# Altium PCB SAT_GPS_CLOCK_1.PcbDoc
Units mm, origin at the board's own origin, x right, y up, seen from the top; angles counter-clockwise.
Board outline 108 x 92 mm, 2 copper layers (Top Layer, Bottom Layer); 26 components, 30 nets, 113 pads, 38 vias.
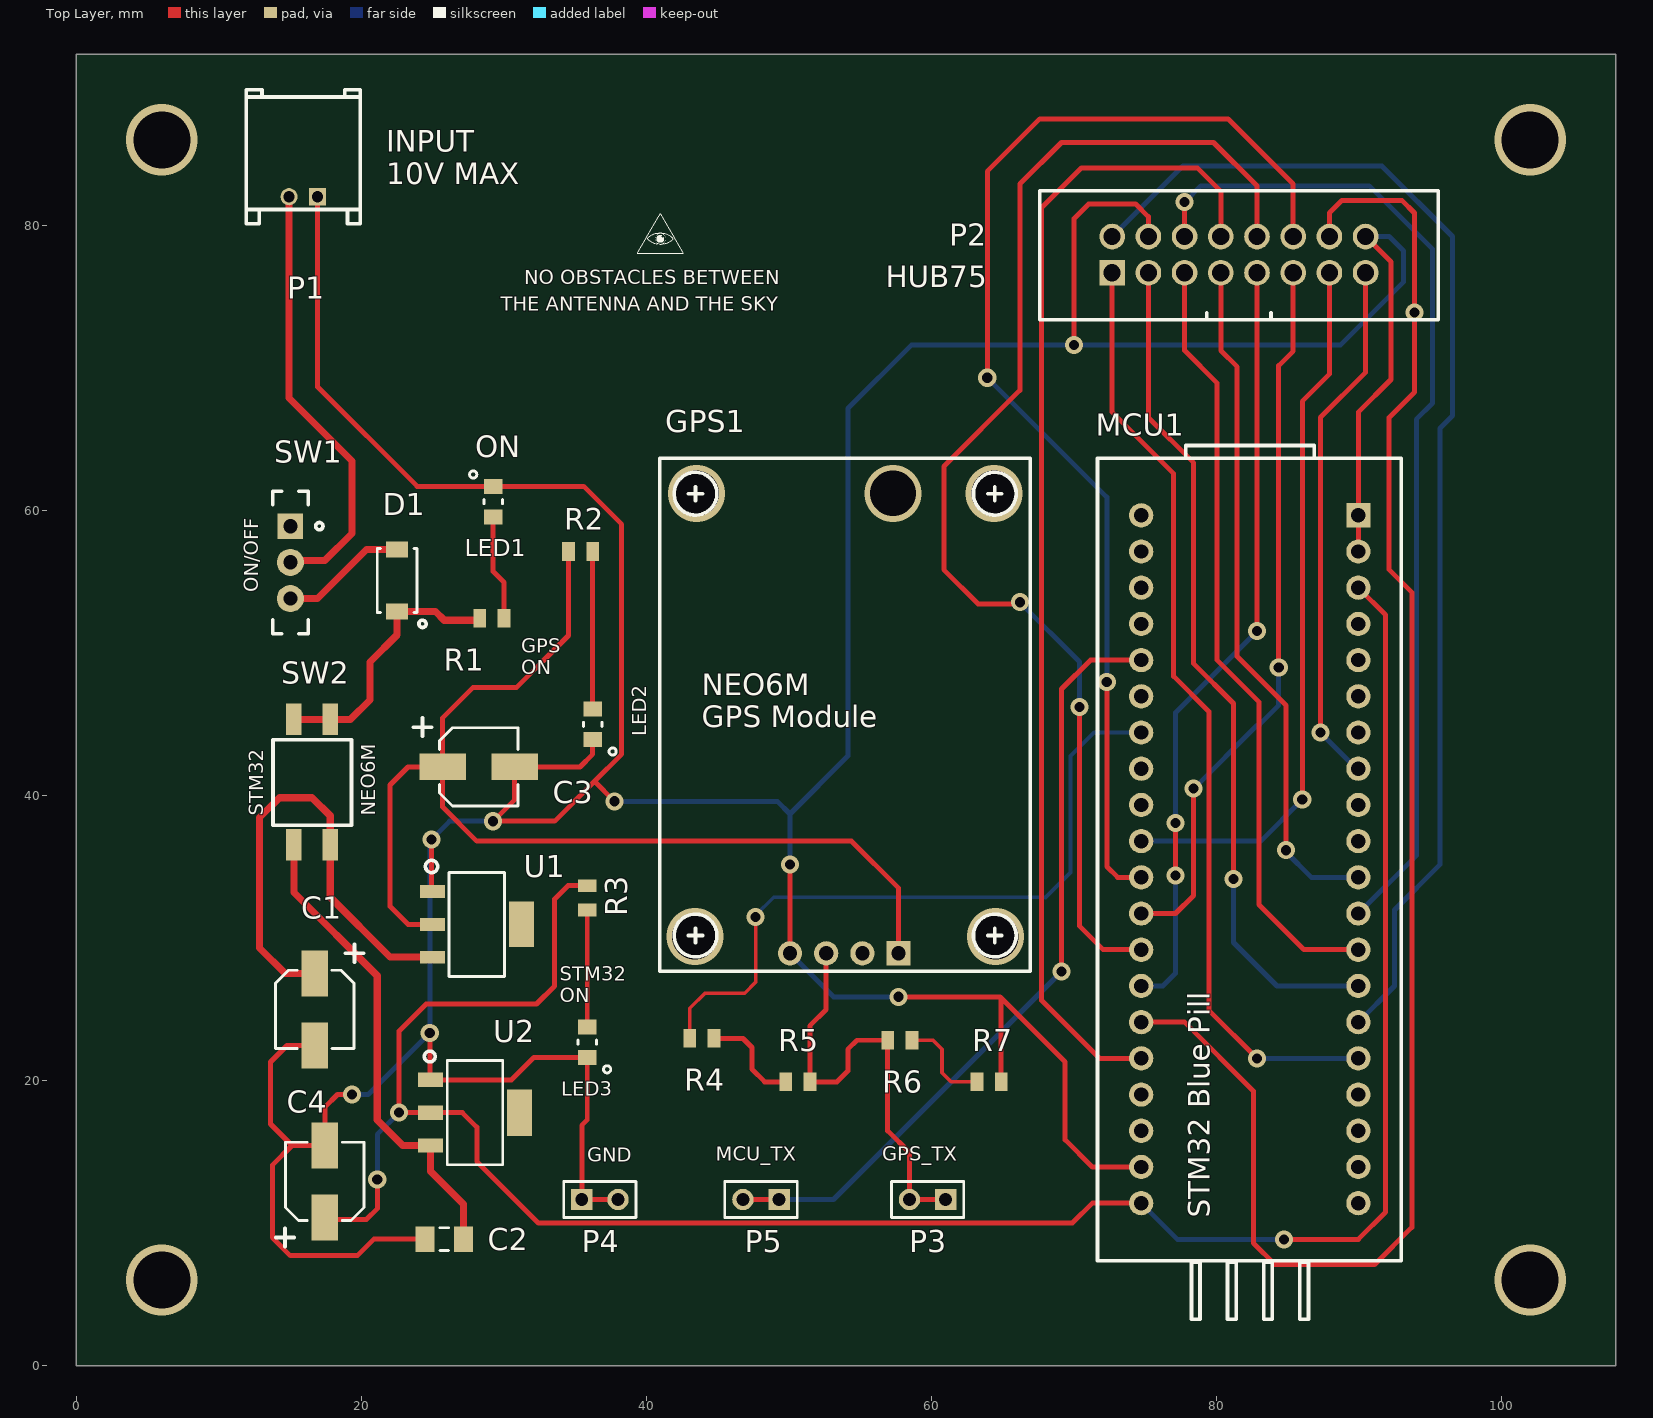
[diagram p0: Top Layer view]
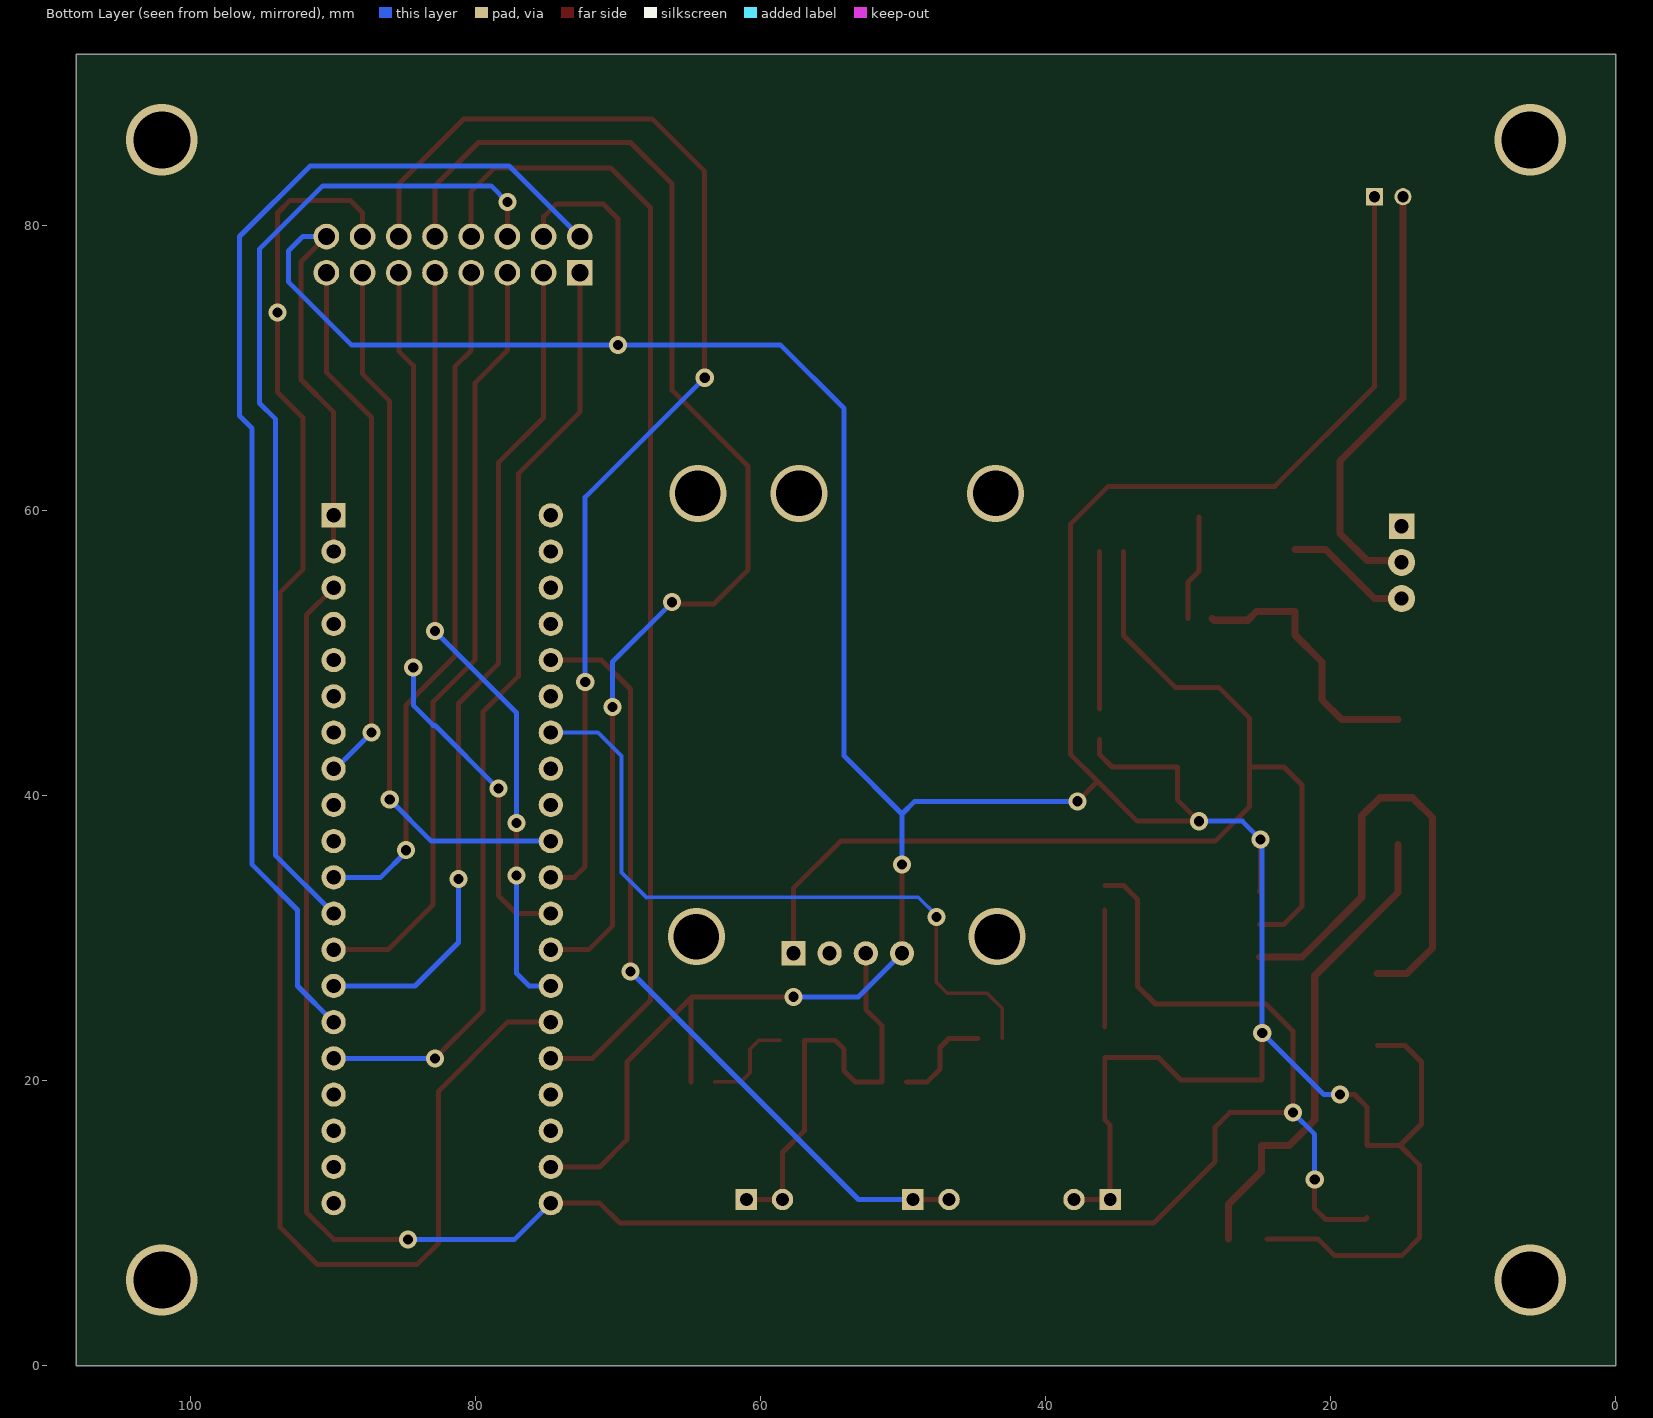
[diagram p1: Bottom Layer view, seen from below]

## Layer stack, top to bottom
Top Solder: solder mask 0.0102, Solder Resist, Dk 3.5
Top Layer: signal copper 0.0356
Dielectric 1: dielectric 0.32, FR-4, Dk 4.8
Bottom Layer: signal copper 0.0356
Bottom Solder: solder mask 0.0102, Solder Resist, Dk 3.5

## Board outline
0,0 108,0 108,92 0,92

## Design rules (kind name [scope] priority, off if disabled: settings)
Clearance [All] p1: gap=0.254 ignorepadtopadclearanceinfootprint=FALSE except(0: Arc-Hole Track-Hole SMDPad-Hole THPad-Hole Via-Hole Fill-Hole Poly-Hole Region-Hole Text-Hole)
PolygonConnect [All] p1: connectstyle=Relief reliefconductorwidth=0.254 reliefentries=4 polygonreliefangle="90 Angle" airgapwidth=0.254
RoutingVias [All] p1: holewidth=0.711 width=1.27 viastyle="Through Hole" minholewidth=0.711 minwidth=1.27 maxholewidth=0.711 maxwidth=1.27
SolderMaskExpansion [All] p1: expansion=0.102 istentingtop=FALSE
Width [All] p1: maxlimit=0.5 minlimit=0.254 preferedwidth=0.35 minimp=50.000000 maximp=50.000000 favimp=50.000000
30 further rules are at their usual default settings.

## Classes and differential pairs
component class SATHORN_GPS_CLOCK_Input: C1 C2 C3 C4 D1 LED1 LED2 LED3 P1 P4 R1 R2 R3 SW1 SW2 U1 U2
component class SATHORN_GPS_CLOCK_IC: GPS1 MCU1 P2 P3 P5 R4 R5 R6 R7

## Components (designator, comment, footprint, x,y, rotation, side; value= is the part's Value field where it differs from the comment)
C1 "10uF" SMT_CAP_EL_CHANG_VT1E100MC054000CE0 16.725,24.987 r270 top
C2 "100nF" SMT_CAP_1206(3216)_SAMSUNG 25.813,8.871 r0 top
C3 "10uF" SMT_CAP_EL_CHANG_VT1E100MC054000CE0 28.226,42.005 r0 top
C4 "10uF" SMT_CAP_EL_CHANG_VT1E100MC054000CE0 17.431,12.922 r90 top
D1 "S1B" DIOM4227X23N 22.511,55.086 r270 top
GPS1 "NEO6M" THT_NEO6M_FINAL 57.69,28.924 r90 top
LED1 "RED" DIOM2012X18N 29.242,60.615 r90 top
LED2 "RED" DIOM2012X18N 36.227,44.994 r270 top
LED3 "RED" DIOM2012X18N 35.846,22.694 r270 top
MCU1 "STM32" STM32F103C6T6_THT 89.948,59.658 r270 top
P1 "5.6-10VDC" THT_CON_WAFER_2P_RIGHT-ANGLE_A2010WR0-2P-SW-5E 14.923,82.01 r0 top
P2 "HUB75" THT_CON_2316S-16G 81.571,77.926 r90 top
P3 "GPS_TX" HDR1X2 60.992,11.652 r180 top
P4 "GND" HDR1X2 35.465,11.652 r0 top
P5 "MCU_TX" HDR1X2 49.308,11.652 r180 top
R1 "1K" SMT_RES_0805(2012) 29.154,52.419 r180 top
R2 "1K" SMT_RES_0805(2012) 35.377,57.118 r180 top
R3 "1K" SMT_RES_0805(2012) 35.846,32.822 r90 top
R4 "50" SMT_RES_0805(2012) 43.886,22.955 r180 top
R5 "100" SMT_RES_0805(2012) 50.617,19.907 r180 top
R6 "500" SMT_RES_0805(2012) 57.778,22.828 r180 top
R7 "300" SMT_RES_0805(2012) 64.04,19.907 r180 top
SW1 "ON/OFF" THT_SSW_ESP1010 15.018,58.896 r270 top
SW2 "DIS02G01-R" SMT_SWITCH_DIP_DIS02G01-R 17.812,45.344 r180 top
U1 "LM1117" SOT230P700X180-4N 28.099,30.956 r0 top
U2 "LD1117AS3" SMT_VR_LD1117AS3 27.972,17.748 r0 top

## Footprints (in the part's own frame and the unit in brackets; to place one, negate y for a bottom-side part, rotate by r counter-clockwise, add the part's x,y. Pads: shape width x height; smd on the part's side, far side on the other; paste and mask are expansions set on the pad)
DIOM2012X18N [mm] "Molded Diode, 2-Leads, Body 2,00x1,25mm, IPC Medium Density"
  rect 1.05x1.3 smd: 1(-1.075,0) 2(1.075,0)
  silkscreen extent -0.15,-0.65 2.16,1.65, body extent -1.1,-0.63 1.1,0.63, height 0.8
DIOM4227X23N [mm] "Molded Diode, 2-Leads, Body 4,25x2,67mm, IPC Medium Density"
  rect 1.1x1.55 smd: 1(-2.175,0) 2(2.175,0)
  silkscreen extent -2.25,-1.4 3.3,2.03, body extent -2.25,-1.4 2.25,1.39, height 2.29
HDR1X2 [mm] "Connector; Header; 2 Position"
  rect 1.5x1.5 hole 0.9: 1(0,0)
  round 1.5 hole 0.9: 2(2.54,0)
  silkscreen extent -1.27,-1.27 3.81,1.27
SMT_CAP_1206(3216)_SAMSUNG [mm] "Ceramic Capacitor 1206(3216) Samsung CL31B104KBCNNNC 50VDC"
  rect 1.3x1.8 smd: 1(-1.35,0) 2(1.35,0)
  silkscreen extent -0.3,-0.8 0.3,0.8, body extent -1.6,-0.9 1.6,0.9, height 1.8
SMT_CAP_EL_CHANG_VT1E100MC054000CE0 [mm] "SMT Capacitor Electrolytic 35V 10uF Pitch 1.3mm VT1E100MC054000CE0"
  rect 3.25x1.85 smd: 1(-2.525,0) 2(2.525,0)
  silkscreen extent -4.57,-2.75 2.75,3.43, body extent -2.75,-2.75 2.75,2.75, height 5.7
SMT_RES_0805(2012) [mm] "0805(2012) Resistor 1/4-1/8W 150V 2A"
  rect 0.9x1.3 smd: 1(-0.85,0) 2(0.85,0)
  body extent -1.1,-0.65 1.1,0.65, height 0.55
SMT_SWITCH_DIP_DIS02G01-R [mm] "DIP SMD Switch 2-Line 4-Pole 2.54Pitch Rating 25mA/24Vdc Height 0.70mm"
  rect 1.1x2.2 smd: 1(0,0) 2(2.55,0) 3(2.55,8.8) 4(0,8.8)
  silkscreen extent -1.49,1.42 4.01,7.42, body extent -1.5,1.4 4,7.4, height 4
SMT_VR_LD1117AS3 [mm] "Voltage Regulator ST LD1117AS33TR 1A 3.3V 10Vmax"
  rect 1.75x1 smd: 1(-3.125,2.3) 2(-3.125,0) 3(-3.125,-2.3)
  rect 1.75x3.25 smd: 4(3.125,0)
  silkscreen extent -3.55,-3.65 1.95,4.32, body extent -1.85,-3.65 1.85,3.65, height 1.8
SOT230P700X180-4N [mm] "SOT223, 4-Leads, Body 7,00x7,00mm (avg), Pitch 2,30mm, IPC Medium Density"
  rect 1.75x0.9 smd: 1(-3.125,2.3) 2(-3.125,0) 3(-3.125,-2.3)
  rect 1.75x3.2 smd: 4(3.125,0)
  silkscreen extent -3.6,-3.65 1.95,4.49, body extent -1.85,-3.65 1.85,3.65, height 1.8
STM32F103C6T6_THT [mm] "STM32F103C8T6 Blue Pill"
  rect 1.7x1.7 hole 1: 1(0,0)
  round 1.7 hole 1: 2(2.54,0) 3(5.08,0) 4(7.62,0) 5(10.16,0) 6(12.7,0) 7(15.24,0) 8(17.78,0) 9(20.32,0) 10(22.86,0) 11(25.4,0) 12(27.94,0) 13(30.48,0) 14(33.02,0) 15(35.56,0) 16(38.1,0) 17(40.64,0) 18(43.18,0) 19(45.72,0) 20(48.26,0) 21(0,-15.24) 22(2.54,-15.24) 23(5.08,-15.24) 24(7.62,-15.24) 25(10.16,-15.24) 26(12.7,-15.24) 27(15.24,-15.24) 28(17.78,-15.24) 29(20.32,-15.24) 30(22.86,-15.24) 31(25.4,-15.24) 32(27.94,-15.24) 33(30.48,-15.24) 34(33.02,-15.24) 35(35.56,-15.24) 36(38.1,-15.24) 37(40.64,-15.24) 38(43.18,-15.24) 39(45.72,-15.24) 40(48.26,-15.24)
  silkscreen extent -4.9,-18.3 56.4,3
THT_CON_2316S-16G [mm] "Connector 2316S-16G 16 Pin 2.54 Pitch"
  rect 1.8x1.8 hole 1.2: 1(-1.25,8.895)
  round 1.8 hole 1.2: 2(1.29,8.895) 3(-1.25,6.355) 4(1.29,6.355) 5(-1.25,3.815) 6(1.29,3.815) 7(-1.25,1.275) 8(1.29,1.275) 9(-1.25,-1.265) 10(1.29,-1.265) 11(-1.25,-3.805) 12(1.29,-3.805) 13(-1.25,-6.345) 14(1.29,-6.345) 15(-1.25,-8.885) 16(1.29,-8.885)
  silkscreen extent -4.55,-13.99 4.5,13.99, body extent -4.59,-14.03 4.55,14, height 8.85
THT_CON_WAFER_2P_RIGHT-ANGLE_A2010WR0-2P-SW-5E [mm] "Connector Wafer 2-Pins Pitch-2.0mm Right Angle A2010WR0-2P-SW-5E"
  rect 1.2x1.2 hole 0.8: 1(2,0)
  round 1.2 hole 0.8: 2(0,0)
  silkscreen extent -3,-1.9 5,7.5, body extent -3,-1.9 5,7.5, height 5.6
THT_NEO6M_FINAL [mm] "GPS Module NEO6M Breakout Board"
  rect 1.7x1.7 hole 1: 1(0,0)
  round 1.7 hole 1: 2(0,2.54) 3(0,5.08) 4(0,7.62)
  silkscreen extent -1.25,-9.25 34.75,16.75
THT_SSW_ESP1010 [mm] "Slide Switch ESP1010 12V 0.5A"
  rect 1.8x1.8 hole 1: 1(0,0)
  round 1.9 hole 1: 2(5.08,0) 3(2.54,0)
  silkscreen extent -2.46,-1.25 7.54,2.29, body extent -2.44,-1.25 7.56,1.25, height 9.5

## Part data
C1 C3 C4: library part SMT_CAP_EL_CHANG_VT1E100MC054000CE0, "SMT Capacitor Electrolytic 35V 10uF Pitch 1.3mm VT1E100MC054000CE0"
C2: library part SMT_CAP_1206(3216)_SAMSUNG, "Ceramic Capacitor 1206(3216) Samsung CL31B104KBCNNNC 50VDC"
D1: library part SMT_DIODE_DO-214AC, "Standart Diode DO-214AC 1A"
GPS1: library part THT_NEO6M_FINAL, "GPS Module NEO6M Breakout Board"
LED1 LED2 LED3: library part SMT_LED_0805(2012), "Led Diode 0805(2012) Cathode Mark, 20mA"
MCU1: library part STM32F103C6T6_THT, "STM32F103C8T6 Blue Pill"
P1: library part THT_CON_WAFER_2P_RIGHT-ANGLE_A2010WR0-2P-SW-5E, "Connector Wafer 2-Pins Pitch-2.0mm Right Angle A2010WR0-2P-SW-5E"
P2: library part THT_CON_2316S-16G, "Connector 2316S-16G 16 Pin 2.54 Pitch"
P3 P4 P5: library part "Header 2", "Header, 2-Pin", LatestRevisionDate=17-Jul-2002, LatestRevisionNote="Re-released for DXP Platform.", Publisher="Altium Limited"
R1 R2 R3 R4 R5 R6 R7: library part SMT_RES_0805(2012), "0805(2012) Resistor 1/4-1/8W 150V 2A"
SW1: library part THT_SSW_ESP1010, "Slide Switch ESP1010 12V 0.5A"
SW2: library part SMT_SWITCH_DIP_DIS02G01-R, "DIP SMD Switch 2-Line 4-Pole 2.54Pitch Rating 25mA/24Vdc Height 0.70mm"
U1: library part LM1117_SOT-223, "LM1117 SOT-223 5V HTC Voltage Regulator"
U2: library part SMT_VR_LD1117AS3, "Voltage Regulator ST LD1117AS33TR 1A 3.3V 10Vmax"

## Via types
v1: diameter 1.27, hole 0.711, Top Layer to Bottom Layer, 29 vias
v2: diameter 4, hole 3.2, Top Layer to Bottom Layer, 5 vias
v3: diameter 5, hole 4, Top Layer to Bottom Layer, 4 vias

## Nets (pads, with @x,y where several pads share a name; then routed paths per layer and width w, separated by ;. In a path a pad name is that pad's centre, name@x,y a point inside that pad or via, vN(x,y) a via of type N, cw(c..) or ccw(c..) an arc to the next point about the centre after c; other vN are vias at no path point)
+3.3V: C4.1 MCU1.3 MCU1.40 R3.2 U2.2 | length 159
  Top Layer w0.35: C4.1 17.573,10.255 20.352,10.255 21.114,11.017 v1(21.114,13.049) ; R3.2 34.498,33.672 33.56,32.734 33.56,26.638 32.29,25.368 24.543,25.368 22.638,23.463 v1(22.638,17.748) U2.2 27.083,17.748 28.099,16.732 28.099,14.319 32.417,10.001 69.882,10.001 71.279,11.398 MCU1.40 ; v1(84.741,8.858) 89.948,8.858 91.853,10.763 91.853,52.673 MCU1.3
  Bottom Layer w0.35: v1(21.114,13.049) 21.114,16.224 v1(22.638,17.748) ; MCU1.40 77.248,8.858 v1(84.741,8.858)
+5V: C3.1 GPS1.1 R2.2 U1.2 | length 78.5
  Top Layer w0.35: U1.2 23.273,30.956 22.003,32.226 22.003,40.735 23.273,42.005 C3.1 ; R2.2 34.527,51.227 30.893,47.593 27.845,47.593 25.701,45.449 C3.1 ; GPS1.1 57.69,33.496 54.388,36.798 28.099,36.798 25.701,39.196 C3.1
GND: C1.2 C2.1 C3.2 C4.2 GPS1.4 LED1.2 LED2.2 LED3.2 MCU1.1 MCU1.2 MCU1.39 P1.1 P2.4 P2.16 P4.1 P4.2 R7.1 U1.1 U2.1 | length 352.8
  Top Layer w0.35: C1.2 14.779,22.462 13.621,21.304 13.621,16.956 15.13,15.447 ; P1.1 16.923,68.675 23.908,61.69 LED1.2 35.592,61.69 38.259,59.023 38.259,42.894 36.354,40.989 ; v1(19.336,19.018) 18.32,19.018 17.431,18.129 C4.2 15.13,15.447 ; C2.1 20.873,8.871 19.717,7.715 15.018,7.715 13.748,8.985 13.748,14.065 15.13,15.447 ; v1(24.797,23.336) 24.797,20.098 U2.1 30.526,20.048 32.097,21.619 LED3.2 35.846,17.24 35.465,16.859 P4.1 P4.2 ; v1(24.924,36.925) 24.924,33.306 U1.1 ; LED2.2 36.227,42.894 35.338,42.005 C3.2 30.751,39.704 v1(29.242,38.195) 33.56,38.195 36.354,40.989 ; v1(37.751,39.592) 36.354,40.989 ; GPS1.4 v1(50.07,35.147) ; v1(57.69,25.876) 64.802,25.876 ; R7.1 64.89,25.788 64.802,25.876 ; v1(70.009,71.596) 70.009,80.486 71.025,81.502 74.327,81.502 75.216,80.613 P2.4 ; MCU1.39 71.279,13.938 69.374,15.843 69.374,21.304 64.802,25.876 ; MCU1.2 MCU1.1 89.948,66.897 92.234,69.183 92.234,77.438 P2.16
  Bottom Layer w0.35: v1(19.336,19.018) 20.479,19.018 v1(24.797,23.336) 24.797,36.798 26.194,38.195 v1(29.242,38.195) ; v1(37.751,39.592) 49.181,39.592 50.07,38.703 ; GPS1.4 53.118,25.876 v1(57.69,25.876) ; v1(50.07,35.147) 50.07,38.703 ; P2.16 92.107,79.216 93.123,78.2 93.123,76.041 88.678,71.596 58.579,71.596 54.134,67.151 54.134,42.767 50.07,38.703
NetC1_1: C1.1 SW2.4 U1.3 | length 34.4
  Top Layer w0.5: C1.1 14.652,27.512 12.859,29.305 12.859,38.449 14.256,39.846 16.542,39.846 17.812,38.576 SW2.4 17.812,32.861 22.003,28.67 24.96,28.67 U1.3
NetC2_2: C2.2 SW2.3 U2.3 | length 33.7
  Top Layer w0.5: SW2.3 15.262,33.203 21.114,27.351 21.114,17.24 22.906,15.448 U2.3 24.847,13.634 27.163,11.318 C2.2
NetD1_1: D1.1 SW1.2 | length 8.9
  Top Layer w0.5: SW1.2 16.923,53.816 20.368,57.261 D1.1
NetD1_2: D1.2 R1.2 SW2.1 SW2.2 | length 19
  Top Layer w0.5: SW2.2 SW2.1 19.246,45.344 20.606,46.704 20.606,49.371 22.511,51.276 D1.2 25.194,52.911 25.813,52.292 28.177,52.292 R1.2
NetGPS1_3: GPS1.3 P3.1 P3.2 R5.1 R6.2 | length 31.4
  Top Layer w0.35: GPS1.3 52.61,24.987 51.467,23.844 R5.1 53.372,19.907 54.134,20.669 54.134,22.193 54.769,22.828 R6.2 56.928,16.478 58.452,14.954 P3.2 P3.1
NetLED1_1: LED1.1 R1.1 | length 7.4
  Top Layer w0.35: LED1.1 29.242,55.721 30.004,54.959 R1.1
NetLED2_1: LED2.1 R2.1 | length 11
  Top Layer w0.35: LED2.1 R2.1
NetLED3_1: LED3.1 R3.1 | length 8.2
  Top Layer w0.35: LED3.1 R3.1
NetMCU1_8: MCU1.8 P2.15 | length 37.3
  Top Layer w0.35: v1(87.281,44.418) 87.281,66.516 90.456,69.691 P2.15
  Bottom Layer w0.35: v1(87.281,44.418) 89.821,41.878 MCU1.8
NetMCU1_11: MCU1.11 P2.7 | length 48.4
  Top Layer w0.35: P2.7 80.296,71.215 81.439,70.072 81.439,49.752 84.868,46.323 v1(84.868,36.163)
  Bottom Layer w0.35: v1(84.868,36.163) 84.868,36.036 86.646,34.258 MCU1.11
NetMCU1_12: MCU1.12 P2.6 | length 70.9
  Top Layer w0.35: P2.6 v1(77.756,81.629)
  Bottom Layer w0.35: v1(77.756,81.629) 78.899,82.772 90.71,82.772 95.155,78.327 95.155,67.532 94.012,66.389 94.012,35.782 MCU1.12
NetMCU1_13: MCU1.13 P2.5 | length 54.8
  Top Layer w0.35: P2.5 77.756,71.215 80.042,68.929 80.042,49.498 82.963,46.577 82.963,32.353 86.138,29.178 MCU1.13
NetMCU1_14: MCU1.14 P2.3 | length 59.5
  Top Layer w0.35: P2.3 75.216,66.516 78.391,63.341 78.391,49.244 81.185,46.45 v1(81.185,34.131)
  Bottom Layer w0.35: v1(81.185,34.131) 81.185,29.686 84.233,26.638 MCU1.14
NetMCU1_15: MCU1.15 P2.2 | length 85.8
  Bottom Layer w0.35: P2.2 77.629,84.169 91.599,84.169 96.552,79.216 96.552,66.643 95.663,65.754 95.663,35.147 92.488,31.972 92.488,26.638 MCU1.15
NetMCU1_16: MCU1.16 P2.1 | length 66.4
  Top Layer w0.35: P2.1 72.676,66.897 76.994,62.579 76.994,48.355 79.455,45.894 79.455,24.939 v1(82.836,21.558)
  Bottom Layer w0.35: v1(82.836,21.558) MCU1.16
NetMCU1_25: MCU1.25 P5.1 P5.2 | length 55.2
  Top Layer w0.35: P5.2 P5.1 ; v1(69.12,27.654) 69.12,47.466 71.152,49.498 MCU1.25
  Bottom Layer w0.35: P5.1 53.118,11.652 v1(69.12,27.654)
NetMCU1_27: MCU1.27 R4.2 | length 49.4
  Top Layer w0.254: R4.2 43.036,25.065 44.101,26.13 46.895,26.13 47.657,26.892 v1(47.657,31.464)
  Bottom Layer w0.254: v1(47.657,31.464) 47.657,31.591 48.927,32.861 67.977,32.861 67.999,32.839 69.755,34.595 69.755,42.767 71.406,44.418 MCU1.27
NetMCU1_30: MCU1.30 P2.13 | length 50.3
  Top Layer w0.35: v1(86.011,39.719) 86.011,67.659 87.916,69.564 P2.13
  Bottom Layer w0.35: MCU1.30 83.09,36.798 v1(86.011,39.719)
NetMCU1_31: MCU1.31 P2.12 | length 83.5
  Top Layer w0.35: v1(63.913,69.31) 63.913,83.788 67.596,87.471 80.804,87.471 85.376,82.899 P2.12 ; v1(72.295,47.974) 72.295,35.02 73.057,34.258 MCU1.31
  Bottom Layer w0.35: v1(63.913,69.31) 72.295,60.928 v1(72.295,47.974)
NetMCU1_32: MCU1.32 P2.11 | length 50.9
  Top Layer w0.35: MCU1.32 77.121,31.718 78.391,32.988 v1(78.391,40.481) ; v1(84.36,48.99) 84.36,70.16 85.376,71.176 P2.11
  Bottom Layer w0.35: v1(78.391,40.481) 82.836,44.926 82.963,44.926 84.36,46.323 v1(84.36,48.99)
NetMCU1_33: MCU1.33 P2.10 | length 87.8
  Top Layer w0.35: v1(66.199,53.562) 66.072,53.435 63.278,53.435 60.865,55.848 60.865,63.087 66.199,68.421 66.199,82.899 69.12,85.82 79.788,85.82 82.836,82.772 P2.10 ; v1(70.39,46.196) 70.39,30.829 72.041,29.178 MCU1.33
  Bottom Layer w0.35: v1(66.199,53.562) 70.39,49.371 v1(70.39,46.196)
NetMCU1_34: MCU1.34 P2.9 | length 54.3
  Top Layer w0.35: v1(77.121,34.385) v1(77.121,38.068) ; v1(82.836,51.53) P2.9
  Bottom Layer w0.35: MCU1.34 76.232,26.638 77.121,27.527 v1(77.121,34.385) ; v1(77.121,38.068) 77.121,45.815 v1(82.836,51.53)
NetMCU1_35: MCU1.35 P2.14 | length 114.3
  Top Layer w0.35: MCU1.35 77.756,24.098 82.582,19.272 82.582,8.604 84.106,7.08 91.08,7.08 93.7,9.7 93.7,54.255 92.107,55.848 92.107,66.516 93.885,68.294 v1(93.885,73.882) 93.885,80.867 92.996,81.756 88.805,81.756 87.916,80.867 P2.14
NetMCU1_36: MCU1.36 P2.8 | length 81.9
  Top Layer w0.35: MCU1.36 71.787,21.558 67.723,25.622 67.723,81.248 70.517,84.042 78.645,84.042 80.296,82.391 P2.8
NetP1_2: P1.2 SW1.3 | length 30.6
  Top Layer w0.5: P1.2 14.923,67.881 19.336,63.468 19.336,58.388 17.435,56.487 15.149,56.487 SW1.3
NetR4_1: R4.1 R5.2 | length 7.2
  Top Layer w0.35: R4.1 46.768,22.955 47.403,22.32 47.403,20.796 48.292,19.907 R5.2
NetR6_1: R6.1 R7.2 | length 6.7
  Top Layer w0.254: R6.1 60.103,22.828 60.738,22.193 60.738,20.542 61.373,19.907 R7.2
pads on no net: GPS1.2 MCU1.4 MCU1.5 MCU1.6 MCU1.7 MCU1.9 MCU1.10 MCU1.17 MCU1.18 MCU1.19 MCU1.20 MCU1.21 MCU1.22 MCU1.23 MCU1.24 MCU1.26 MCU1.28 MCU1.29 MCU1.37 MCU1.38 SW1.1 U1.4 U2.4
copper on no net:
  other v2: 43.4,30.1 64.5,30.1 43.5,61.2 57.3,61.2 64.4,61.2
  other v3: 6,6 102,6 6,86 102,86

## Silkscreen, mask and mechanical layers (free items; w line width, h text height)
Top Overlay:
  drawing of 3 lines, arcs and shapes, not listed
  text "INPUT / 10V MAX" at 21.749,82.899 h1.5
  text "NO OBSTACLES BETWEEN" at 31.429,75.873 h1
  text "HUB75" at 56.801,75.66 h1.5
  text "THE ANTENNA AND THE SKY" at 29.789,74.007 h1
  text "ON" at 27.972,63.722 h1.5
  text "ON/OFF" at 12.746,54.254 h1 r90
  text "GPS / ON" at 31.214,48.5 h1
  text "NEO6M / GPS Module" at 43.889,44.799 h1.5
  text "STM32" at 13.113,38.576 h1 r90
  text "NEO6M" at 20.987,38.576 h1 r90
  text "STM32  / ON" at 33.9,25.5 h1
  text "MCU_TX" at 44.863,14.359 h1
  text "GPS_TX" at 56.547,14.359 h1
  text "GND" at 35.846,14.319 h1
  text "STM32 Blue Pill" at 79.534,10.382 h1.5 r90
Mechanical 1:
  the board outline again, w0.001